# Altium PCB main board_PCB.PcbDoc
Units mm, origin at the board's own origin, x right, y up, seen from the top; angles counter-clockwise.
Board outline 135 x 63 mm, 2 copper layers (Top Layer, Bottom Layer); 89 components, 118 nets, 471 pads, 52 vias.
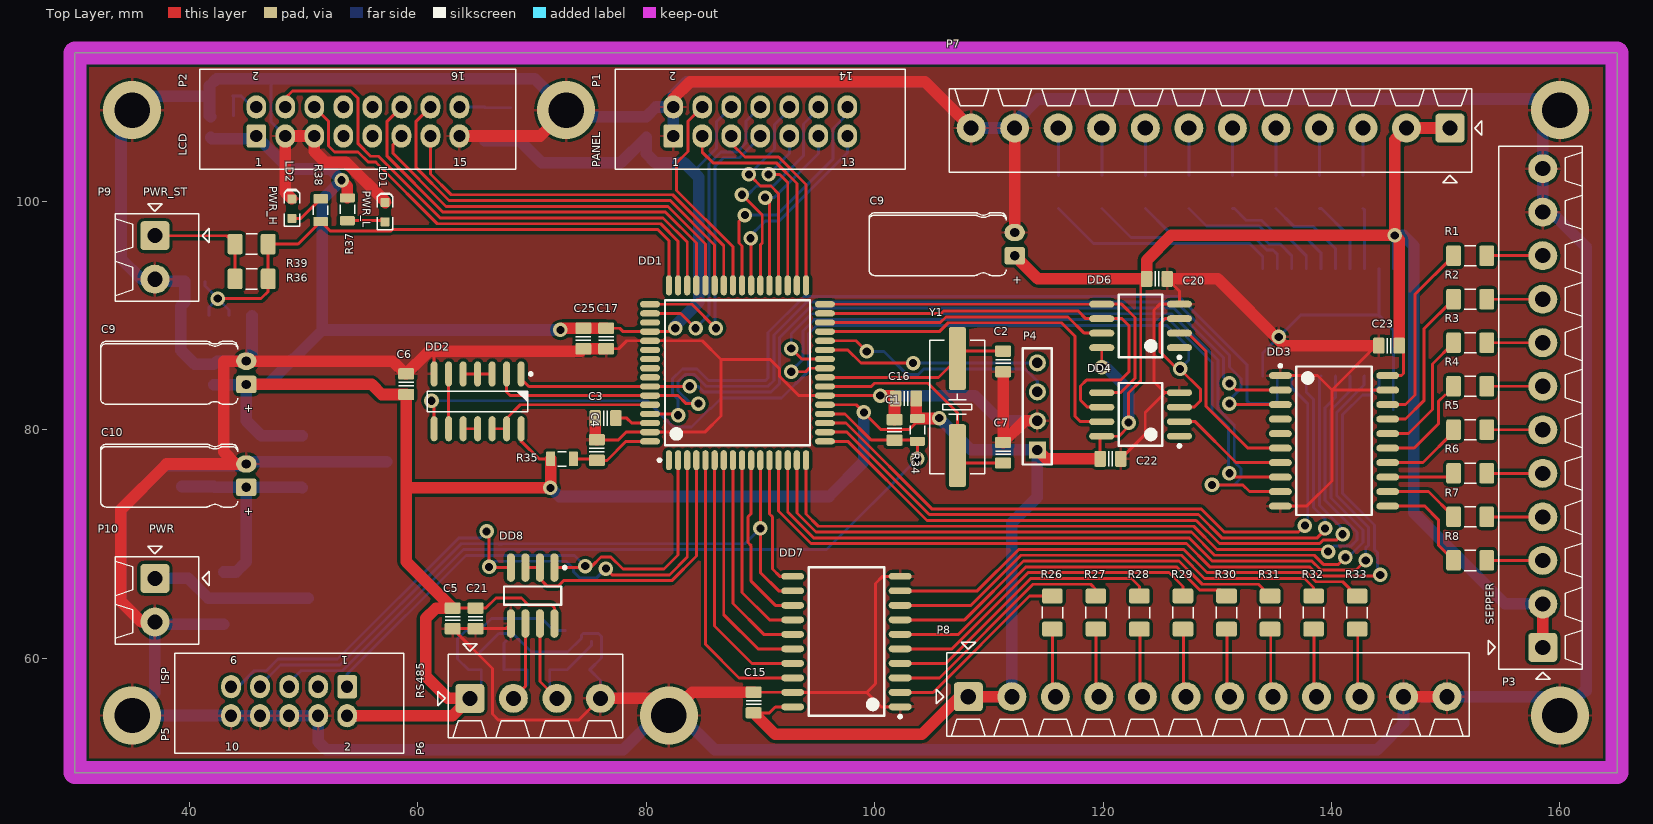
[diagram p0: Top Layer view]
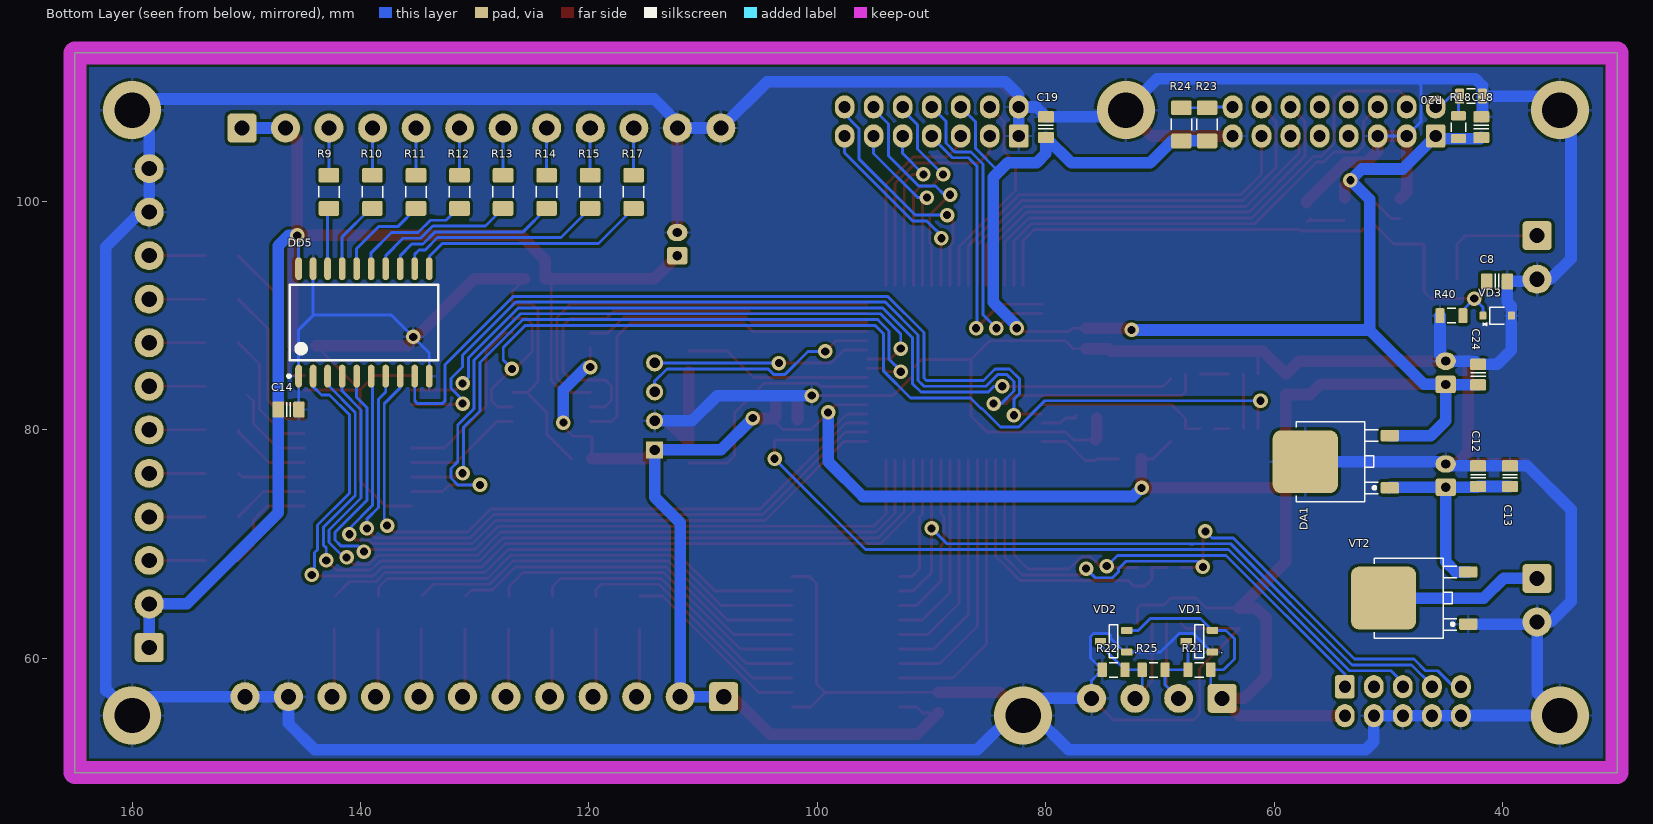
[diagram p1: Bottom Layer view, seen from below]

## Layer stack, top to bottom
Top Layer: signal copper 0.0356
Dielectric: dielectric 0.32, FR-4, Dk 4.8
Bottom Layer: signal copper 0.0356

## Board outline
30,50 30,113 165,113 165,50

## Design rules (kind name [scope] priority, off if disabled: settings)
Clearance [All] p1: gap=0.254
PolygonConnect [All] p1: connectstyle=Relief reliefconductorwidth=0.254 reliefentries=4 polygonreliefangle="90 Angle" airgapwidth=0.254
RoomDefinition "main board_CHM" [InComponentClass('main board_CHM')] p1: confinementstyle=ConfineIn formatcopy=TRUE lockcomponents=FALSE outline 165,113 30,113 30,50 165,50
RoutingVias [All] p1: holewidth=0.711 width=1.27 viastyle="Through Hole" minholewidth=0.711 minwidth=1.27 maxholewidth=0.711 maxwidth=1.27
SilkscreenOverComponentPads [All] p1: minsilkscreentomaskgap=0.254
SolderMaskExpansion [All] p1: expansion=0.102
Width "Schematic Width Constraint_2" [InNet('NetP10_1')] p1: maxlimit=1.016 minlimit=0.254 preferedwidth=1.016
Width "Schematic Width Constraint_1" [InNet('GND')] p2: maxlimit=1.016 minlimit=0.254 preferedwidth=1.016
Width "Schematic Width Constraint" [InNet('VCC+12V')] p3: maxlimit=1.016 minlimit=0.254 preferedwidth=1.016
Width "Schematic Width Constraint_3" [InNet('VCC')] p4: maxlimit=1.016 minlimit=0.254 preferedwidth=1.016
Width [All] p5: maxlimit=0.254 minlimit=0.254 preferedwidth=0.254
27 further rules are at their usual default settings.

## Components (designator, comment, footprint, x,y, rotation, side; value= is the part's Value field where it differs from the comment)
C1 "C0805" CAPC2012X135N 101.75,80 r270 top
C2 "C0805" CAPC2012X135N 111.25,86 r90 top
C3 "C0805" CAPC2012X135N 76.454,81.026 r0 top
C4 "C0805" CAPC2012X135N 75.692,78.232 r270 top
C5 "C0805" CAPC2012X135N 63.07,63.5 r90 top
C6 "C0805" CAPC2012X135N 59,84 r270 top
C7 "C0805" CAPC2012X135N 111.25,78 r270 top
C8 "C0805" CAPC2012X135N 40.5,93 r0 bottom
C9 "Cap Pol1" CAPAE200P550X1200_FLAT1 112.268,96.266 r90 top
C9 "Cap Pol1" CAPAE200P550X1200_FLAT1 45,85 r90 top
C10 "Cap Pol1" CAPAE200P550X1200_FLAT1 45,76 r90 top
C12 "C0805" CAPC2012X135N 42.164,75.946 r270 bottom
C13 "C0805" CAPC2012X135N 39.37,75.946 r270 bottom
C14 "C0805" CAPC2012X135N 146.304,81.788 r0 bottom
C15 "C0805" CAPC2012X135N 89.408,56.134 r270 top
C16 "C0805" CAPC2012X135N 102.75,82.75 r0 top
C17 "C0805" CAPC2012X135N 76.5,88 r90 top
C18 "C0805" CAPC2012X135N 41.888,106.5 r270 bottom
C19 "C0805" CAPC2012X135N 80,106.5 r270 bottom
C20 "C0805" CAPC2012X135N 124.714,93.218 r180 top
C21 "C0805" CAPC2012X135N 65.07,63.5 r90 top
C22 "C0805" CAPC2012X135N 120.65,77.47 r180 top
C23 "C0805" CAPC2012X135N 145.034,87.376 r0 top
C24 "C0805" CAPC2012X135N 42.164,84.836 r270 bottom
C25 "C0805" CAPC2012X135N 74.5,88 r90 top
DA1 "MC7805CD2TR4G" TO-252 53.594,77.216 r90 bottom
DD1 "ATmega128A-AU" 64A_N 88,85 r90 top
DD2 "MC74HC00AD" SOIC127P600X175-14AN 65.25,82.5 r270 top
DD3 "MC74HC541ADW" 751D-05_N 140.224,79.042 r0 top
DD4 "ATtiny25V-10SU" 8S2_N 123.288,81.353 r180 top
DD5 "MC74HC541ADW" 751D-05_N 139.7,89.408 r90 bottom
DD6 "ATtiny25V-10SU" 8S2_N 123.288,89.103 r180 top
DD7 "MC74HC541ADW" 751D-05_N 97.536,61.468 r180 top
DD8 "MAX485" S8S1_M 70.07,65.5 r270 top
LD1 "PWR_L" LED-0603-BLUE 57.15,99.06 r90 top
LD2 "PWR_H" LED-0603-GREEN 48.992,99.372 r90 top
P1 "PANEL" 14P_PCB_HEADER_BRD_MNT 90,107 r90 top
P2 "LCD" 16P_PCB_HEADER_BRD_MNT 54.768,107 r90 top
P3 "SEPPER" 12P_PCB_ScrewTerm_90S_3.81MM 158.496,60.96 r0 top
P4 "DEBUG" HDR1X4 114.25,78.25 r90 top
P5 "ISP" 10P_PCB_HEADER_BRD_MNT 48.75,56.25 r270 top
P6 "RS485" 4P_PCB_ScrewTerm_90S_3.81MM 64.57,56.5 r270 top
P7 "OUTPUTS" 12P_PCB_ScrewTerm_90S_3.81MM 150.368,106.426 r90 top
P8 "INPUTS" 12P_PCB_ScrewTerm_90S_3.81MM 108.204,56.642 r270 top
P9 "PWR_ST" 2P_PCB_ScrewTerm_90S_3.81MM 37,97 r180 top
P10 "PWR" 2P_PCB_ScrewTerm_90S_3.81MM 37,67 r180 top
R1 "Res2" RESC3216X70N 152.146,95.25 r0 top
R2 "Res2" RESC3216X70N 152.146,91.44 r0 top
R3 "Res2" RESC3216X70N 152.146,87.63 r0 top
R4 "Res2" RESC3216X70N 152.146,83.82 r0 top
R5 "Res2" RESC3216X70N 152.146,80.01 r0 top
R6 "Res2" RESC3216X70N 152.146,76.2 r0 top
R7 "Res2" RESC3216X70N 152.146,72.39 r0 top
R8 "Res2" RESC3216X70N 152.146,68.58 r0 top
R9 "Res2" RESC3216X70N 142.764,100.838 r90 bottom
R10 "Res2" RESC3216X70N 138.954,100.838 r90 bottom
R11 "Res2" RESC3216X70N 135.144,100.838 r90 bottom
R12 "Res2" RESC3216X70N 131.334,100.838 r90 bottom
R13 "Res2" RESC3216X70N 127.524,100.838 r90 bottom
R14 "Res2" RESC3216X70N 123.714,100.838 r90 bottom
R15 "Res2" RESC3216X70N 119.904,100.838 r90 bottom
R17 "Res2" RESC3216X70N 116.094,100.838 r90 bottom
R18 "Res2" RESC2012X70N 43.888,106.5 r90 bottom
R20 "Res2" RESC2012X70N 42.784,109.22 r0 bottom
R21 "Res2" RESC2012X70N 66.57,59 r180 bottom
R22 "Res2" RESC2012X70N 74.07,59 r180 bottom
R23 "Res2" RESC3216X70N 65.888,106.75 r90 bottom
R24 "Res2" RESC3216X70N 68.138,106.75 r90 bottom
R25 "Res2" RESC2012X70N 70.57,59 r0 bottom
R26 "Res2" RESC3216X70N 115.57,64.008 r270 top
R27 "Res2" RESC3216X70N 119.38,64.008 r270 top
R28 "Res2" RESC3216X70N 123.19,64.008 r270 top
R29 "Res2" RESC3216X70N 127,64.008 r270 top
R30 "Res2" RESC3216X70N 130.81,64.008 r270 top
R31 "Res2" RESC3216X70N 134.62,64.008 r270 top
R32 "Res2" RESC3216X70N 138.43,64.008 r270 top
R33 "Res2" RESC3216X70N 142.24,64.008 r270 top
R34 "Res2" RESC2012X70N 103.75,80 r270 top
R35 "Res2" RESC2012X70N 72.644,77.47 r180 top
R36 "Res2" RESC3216X70N 45.466,93.218 r0 top
R37 "Res2" RESC2012X70N 53.848,99.314 r90 top
R38 "Res2" RESC2012X70N 51.514,99.236 r270 top
R39 "Res2" RESC3216X70N 45.466,96.266 r0 top
R40 "Res2" RESC2012X70N 44.5,90 r180 bottom
VD1 "BAV99" SOT23-3 66.57,61.5 r0 bottom
VD2 "BAV99" SOT23-3 74.07,61.5 r0 bottom
VD3 "PDZ5.1V" SOD323 40.5,90 r180 bottom
VT2 "IRFU5505" TO-252 46.736,65.278 r90 bottom
Y1 "HC49/4H_SMX" CRYSTAL_HC49-US-SM 107.25,82 r90 top

## Footprints (in the part's own frame and the unit in brackets; to place one, negate y for a bottom-side part, rotate by r counter-clockwise, add the part's x,y. Pads: shape width x height; smd on the part's side, far side on the other; paste and mask are expansions set on the pad)
2P_PCB_ScrewTerm_90S_3.81MM [mil] "TERM BLOCK 2POS SIDE ENT STACKABLE 3.81MM"
  rrect25% 100x100 hole 52: 1(0,0)
  round 100 hole 52: 2(0,150)
  silkscreen extent -188,-110 136,226, body extent -152,-75 136,225, height 335
4P_PCB_ScrewTerm_90S_3.81MM [mil]
  rrect25% 100x100 hole 52: 1(0,0)
  round 100 hole 52: 2(0,150) 3(0,300) 4(0,450)
  silkscreen extent -188,-110 136,526, body extent -152,-75 136,525, height 335
8S2_N [mm] "SOP, 8-Leads, Body 5.3x5.3mm, Pitch 1.27mm, IPC Medium Density"
  oval 2.2x0.6 smd: 1(-3.4,1.905) 2(-3.4,0.635) 3(-3.4,-0.635) 4(-3.4,-1.905) 5(3.4,-1.905) 6(3.4,-0.635) 7(3.4,0.635) 8(3.4,1.905)
  silkscreen extent -3.52,-2.75 1.9,2.88, body extent -2.73,-2.75 2.73,2.75, height 2.16
10P_PCB_HEADER_BRD_MNT [mil] "HEADER BRD MNT 10POS 2.54MM"
  round 40 on Mech15: 0(0,0)
  rrect25% 80x68 hole 42: 1(-50,200)
  oval 80x68 hole 42: 2(50,200) 3(-50,100) 4(50,100) 5(-50,0) 6(50,0) 7(-50,-100) 8(50,-100) 9(-50,-200) 10(50,-200)
  silkscreen extent -165,-395 180,395, body extent -162,-394 178,394, height 390
12P_PCB_ScrewTerm_90S_3.81MM [mil]
  rrect25% 100x100 hole 52: 1(0,0)
  round 100 hole 52: 2(0,150) 3(0,300) 4(0,450) 5(0,600) 6(0,750) 7(0,900) 8(0,1050) 9(0,1200) 10(0,1350) 11(0,1500) 12(0,1650)
  silkscreen extent -188,-110 136,1726, body extent -152,-75 139,1725, height 335
14P_PCB_HEADER_BRD_MNT [mil] "HEADER BRD MNT 14POS 2.54MM"
  round 40 on Mech15: 0(0,0)
  rrect25% 80x68 hole 42: 1(-50,300)
  oval 80x68 hole 42: 2(50,300) 3(-50,200) 4(50,200) 5(-50,100) 6(50,100) 7(-50,0) 8(50,0) 9(-50,-100) 10(50,-100) 11(-50,-200) 12(50,-200) 13(-50,-300) 14(50,-300)
  silkscreen extent -165,-500 180,500, body extent -162,-494 178,494, height 390
16P_PCB_HEADER_BRD_MNT [mil] "HEADER BRD MNT 16POS 2.54MM"
  round 40 on Mech15: 0(0,0)
  rrect25% 80x68 hole 42: 1(-50,350)
  oval 80x68 hole 42: 2(50,350) 3(-50,250) 4(50,250) 5(-50,150) 6(50,150) 7(-50,50) 8(50,50) 9(-50,-50) 10(50,-50) 11(-50,-150) 12(50,-150) 13(-50,-250) 14(50,-250) 15(-50,-350) 16(50,-350)
  silkscreen extent -165,-545 180,545, body extent -162,-544 178,544, height 390
64A_N [mm] "Thin QFP, 64-Leads, Body 14x14mm, Pitch 0.8mm, IPC Medium Density"
  oval 1.75x0.55 smd: 1(-7.65,6) 2(-7.65,5.2) 3(-7.65,4.4) 4(-7.65,3.6) 5(-7.65,2.8) 6(-7.65,2) 7(-7.65,1.2) 8(-7.65,0.4) 9(-7.65,-0.4) 10(-7.65,-1.2) 11(-7.65,-2) 12(-7.65,-2.8) 13(-7.65,-3.6) 14(-7.65,-4.4) 15(-7.65,-5.2) 16(-7.65,-6) 33(7.65,-6) 34(7.65,-5.2) 35(7.65,-4.4) 36(7.65,-3.6) 37(7.65,-2.8) 38(7.65,-2) 39(7.65,-1.2) 40(7.65,-0.4) 41(7.65,0.4) 42(7.65,1.2) 43(7.65,2) 44(7.65,2.8) 45(7.65,3.6) 46(7.65,4.4) 47(7.65,5.2) 48(7.65,6)
  oval 0.55x1.75 smd: 17(-6,-7.65) 18(-5.2,-7.65) 19(-4.4,-7.65) 20(-3.6,-7.65) 21(-2.8,-7.65) 22(-2,-7.65) 23(-1.2,-7.65) 24(-0.4,-7.65) 25(0.4,-7.65) 26(1.2,-7.65) 27(2,-7.65) 28(2.8,-7.65) 29(3.6,-7.65) 30(4.4,-7.65) 31(5.2,-7.65) 32(6,-7.65) 49(6,7.65) 50(5.2,7.65) 51(4.4,7.65) 52(3.6,7.65) 53(2.8,7.65) 54(2,7.65) 55(1.2,7.65) 56(0.4,7.65) 57(-0.4,7.65) 58(-1.2,7.65) 59(-2,7.65) 60(-2.8,7.65) 61(-3.6,7.65) 62(-4.4,7.65) 63(-5.2,7.65) 64(-6,7.65)
  silkscreen extent -7.77,-6.35 6.35,6.95, body extent -7,-7 7,7, height 1.2
751D-05_N [mm] "SOIC, 20-Leads, Body 12.8x7.5mm, Pitch 1.27mm, IPC Medium Density"
  oval 2x0.6 smd: 1(-4.7,5.715) 2(-4.7,4.445) 3(-4.7,3.175) 4(-4.7,1.905) 5(-4.7,0.635) 6(-4.7,-0.635) 7(-4.7,-1.905) 8(-4.7,-3.175) 9(-4.7,-4.445) 10(-4.7,-5.715) 11(4.7,-5.715) 12(4.7,-4.445) 13(4.7,-3.175) 14(4.7,-1.905) 15(4.7,-0.635) 16(4.7,0.635) 17(4.7,1.905) 18(4.7,3.175) 19(4.7,4.445) 20(4.7,5.715)
  silkscreen extent -4.82,-6.5 3.3,6.69, body extent -3.8,-6.5 3.8,6.5, height 2.65
CAPAE200P550X1200_FLAT1 [mil]
  round 20 on Mech15: 0(0,0)
  rrect25% 60x70 hole 31.5: 1(-40,0)
  oval 60x70 hole 31.5: 2(40,0)
  silkscreen extent -108,30 108,502, body extent -107,-10 107,502, height 216
CAPC2012X135N [mm] "Chip Capacitor, Body 2.0x1.2mm, EIA 0805, IPC Medium Density"
  round 0.254 on Mech15: 0(0,0)
  rrect25% 1x1.4 smd: 1(-0.9,0) 2(0.9,0)
  Top Layer pour cut-out: -0.675,0.7 -0.475,0.9 0.475,0.9 0.675,0.7 0.675,-0.7 0.475,-0.9 -0.475,-0.9 -0.675,-0.7
  silkscreen extent -0.15,-0.65 0.15,0.65, body extent -1.1,-0.72 1.1,0.73, height 1.34
CRYSTAL_HC49-US-SM [mm] "SMD Crystal HC49/US-SM package"
  round 0.508 on Mech15: 0(0,0)
  rrect25% 5.5x1.5 smd: 1(-4.25,0) 2(4.25,0)
  silkscreen extent -5.84,-2.41 5.84,2.41, body extent -6.4,-2.41 6.4,2.42, height 4.29
HDR1X4 [mm] "Connector; Header; 4 Position"
  rect 1.5x1.5 hole 0.9: 1(0,0)
  round 1.5 hole 0.9: 2(2.54,0) 3(5.08,0) 4(7.62,0)
  silkscreen extent -1.27,-1.27 8.89,1.27
LED-0603-BLUE [mm]
  round 0.254 on Mech15: 0(0,0)
  rrect25% 0.8x0.8 smd: A(-0.85,0) K(0.85,0)
  Top Layer pour cut-out: -0.5,0.5 0.5,0.5 0.5,-0.5 -0.5,-0.5
  silkscreen extent -1.55,-0.67 1.68,0.67, body extent -0.8,-0.4 0.8,0.4, height 0.75
LED-0603-GREEN [mm]
  round 0.254 on Mech15: 0(0,0)
  rrect25% 0.8x0.8 smd: A(-0.85,0) K(0.85,0)
  Top Layer pour cut-out: -0.5,0.5 0.5,0.5 0.5,-0.5 -0.5,-0.5
  silkscreen extent -1.55,-0.67 1.68,0.67, body extent -0.8,-0.4 0.8,0.4, height 0.75
RESC2012X70N [mm] "Chip Resistor, Body 2.0x1.2mm, EIA 0805, IPC Medium Density"
  round 0.254 on Mech15: 0(0,0)
  rrect25% 0.8x1.3 smd: 1(-1,0) 2(1,0)
  Top Layer pour cut-out: -0.725,0.65 -0.525,0.85 0.525,0.85 0.725,0.65 0.725,-0.65 0.525,-0.85 -0.525,-0.85 -0.725,-0.65
  silkscreen extent -0.38,-0.64 0.38,0.64, body extent -1.1,-0.67 1.1,0.68, height 0.69
RESC3216X70N [mm] "Chip Resistor, Body 3.2x1.6mm, EIA 1206, IPC Medium Density"
  round 0.508 on Mech15: 0(0,0)
  rrect25% 1.3x1.8 smd: 1(-1.45,0) 2(1.45,0)
  silkscreen extent -0.51,-0.89 0.51,0.89, body extent -1.62,-0.82 1.63,0.83, height 0.69
S8S1_M [mm] "SOIC, 8-Leads, Body 4.9x3.9mm, Pitch 1.27mm, IPC Low Density"
  oval 2.5x0.7 smd: 1(-2.45,1.905) 2(-2.45,0.635) 3(-2.45,-0.635) 4(-2.45,-1.905) 5(2.45,-1.905) 6(2.45,-0.635) 7(2.45,0.635) 8(2.45,1.905)
  silkscreen extent -2.57,-2.5 0.8,2.93, body extent -2,-2.5 2,2.5, height 1.75
SOD323 [mm] "SOD-323; 2 Leads; Body 1.8 x 1.35 mm, (LxW)"
  round 0.508 on Mech15: 0(0,0)
  rrect25% 0.6x0.7 smd: A(1.25,0) K(-1.25,0)
  silkscreen extent -1.2,-0.9 0.64,0.75, body extent -1.3,-0.68 1.3,0.67, height 1.1
SOIC127P600X175-14AN [mm] "SOIC, 1.27mm pitch, 14 pin, Body 8.65x3.90mm"
  round 1 on Mech15: 0(0,0)
  oval 2.2x0.6 smd: 1(-2.4,3.81) 2(-2.4,2.54) 3(-2.4,1.27) 4(-2.4,0) 5(-2.4,-1.27) 6(-2.4,-2.54) 7(-2.4,-3.81) 8(2.4,-3.81) 9(2.4,-2.54) 10(2.4,-1.27) 11(2.4,0) 12(2.4,1.27) 13(2.4,2.54) 14(2.4,3.81)
  silkscreen extent -2.52,-4.4 0.9,4.79, body extent -3.01,-4.32 3.01,4.33, height 1.75
SOT23-3 [mm] "SOT23, 3 pin"
  round 0.5 on Mech15: 0(0,0)
  rrect25% 1x0.6 smd: 1(-1.15,0.95) 2(-1.15,-0.95) 3(1.15,0)
  silkscreen extent -0.38,-1.45 0.38,1.45, body extent -1.4,-1.45 1.4,1.45, height 1.29
TO-252 [mm] "D-PAK/TO-252-AA; 3 Leads (1 Cropped); Body 10.3 (inc. leads) x 6.7 mm (LxW max)"
  round 0.5 on Mech15: 0(0,0)
  rrect25% 1x1.6 smd: 1(-2.285,-3.7) 3(2.285,-3.7)
  rrect25% 5.5x5.7 smd: 4(0,3.7)
  silkscreen extent -3.5,-2.7 3.5,4.5, body extent -3.3,-3.95 3.3,5.76, height 2.31

## Part data
C1 C2 C3 C4 C5 C6 C7 C8 C12 C13 C14 C15 C16 C17 C18 C19 C20 C21 C22 C23 C24 C25: "Ceramic Chip Capacitor - Standard"
C9 C9 C10: "Polarized Capacitor (Radial)"
DA1: library part µA78M05CKTPR, "Positive-Voltage Regulator"
DD1: "8-bit AVR Microcontroller, 128KB Flash, 4KB EEPROM, 4KB SRAM, 64-pin TQFP, Industrial Grade (-40°C to 85°C)"
DD2: "Quad 2-Input NAND Gate"
DD3 DD5 DD7: "Octal 3-State Non-Inverting Buffer/Line Driver/Line Receiver"
DD4 DD6: "8-bit AVR Microcontroller, 1.8-5.5V, 2KB Flash, 128 Bytes EEPROM, 128 Bytes SRAM, 8-pin SOP, Industrial Grade (-40°C to 85°C), Pb-Free"
DD8: library part ST485
LD1 LD2: library part LED, "APT1608QBC/D"
P1: library part "Header 14", "Header, 14-Pin"
P2: library part "Header 16", "Header, 16-Pin"
P3 P7 P8: library part "Header 12", "Header, 12-Pin"
P4: library part "Header 4", "Header, 4-Pin"
P5: library part "Header 5X2", "Header, 5-Pin, Dual row"
P6: library part MHDR1X4, "Header, 4-Pin"
P9 P10: library part "Header 2H", "Header, 2-Pin, Right Angle"
R1 R2 R3 R4 R5 R6 R7 R8 R9 R10 R11 R12 R13 R14 R15 R17 R18 R20 R21 R22 R23 R24 R25 R26 R27 R28 R29 R30 R31 R32 R33 R34 R35 R36 R37 R38 R39 R40: "Resistor"
VD1 VD2: "Silicon Switching Diode Array for High-Speed Switching"
VD3: library part BAS170W, "Silicon AF Schottky Diode for High-Speed Switching"
VT2: "HEXFET Power MOSFET"
Y1: "Surface Mount Quartz Crystal"

## Via types
v1: diameter 1.27, hole 0.711, Top Layer to Bottom Layer, 46 vias
v2: diameter 5.08, hole 3.1, Top Layer to Bottom Layer, 6 vias

## Nets (pads, with @x,y where several pads share a name; then routed paths per layer and width w, separated by ;. In a path a pad name is that pad's centre, name@x,y a point inside that pad or via, vN(x,y) a via of type N, cw(c..) or ccw(c..) an arc to the next point about the centre after c; other vN are vias at no path point)
A: DD8.6 P6.2 R21.1 R25.1 VD1.3 | length 14.5
  Top Layer w0.254: P6.2 69.435,57.555 DD8.6
  Bottom Layer w0.254: VD1.3 67.57,61.35 R21.1 R25.1 69.57,57.69 P6.2
AREF: C3.2 DD1.62 | length 3.5
  Top Layer w0.254: C3.2 C3.2@77.608,81.026 ; C3.2@77.354,81.28 C3.2@77.608,81.026 ; DD1.62 78.74,80.6 78.314,81.026 C3.2@77.608,81.026
AVCC: C4.2 DD1.64 R35.1 | length 7.5
  Top Layer w0.254: R35.1 75.554,77.47 C4.2 76.57,77.332 78.238,79 DD1.64
B: DD8.7 P6.3 R22.2 R25.2 VD2.3 | length 14.8
  Top Layer w0.254: DD8.7 70.705,57.985 P6.3
  Bottom Layer w0.254: P6.3 71.57,57.12 R25.2 R22.2 75.22,61.15 VD2.3
B_LIG: P2.16 R23.2 R24.2 | length 4.5
  Bottom Layer w0.254: P2.16 R23.2@65.888,108.27 ; R23.2 R24.2
BPR: DD1.49 P1.7 | length 26
  Top Layer w0.254: DD1.49 84.006,91 v1(86.106,88.9)
  Bottom Layer w0.254: v1(86.106,88.9) 86.019,88.987 86.019,103.065 86.778,103.825 88.186,103.825 90,105.639 P1.7
BUT1: DD1.50 P1.8 | length 27.1
  Top Layer w0.254: DD1.50 83.028,90.2 v1(84.328,88.9)
  Bottom Layer w0.254: v1(84.328,88.9) 85.511,90.083 85.511,103.276 86.568,104.333 87.976,104.333 88.755,105.113 88.755,107.025 P1.8
BUT2: DD1.35 P1.9 | length 15.1
  Top Layer w0.254: v1(90.716,102.362) 91.694,102.362 92.4,101.656 DD1.35
  Bottom Layer w0.254: v1(90.716,102.362) 92.54,104.186 P1.9
BUT3: DD1.36 P1.10 | length 18.9
  Top Layer w0.254: v1@89.208,102.162 90.024,101.346 90.932,101.346 91.6,100.678 DD1.36
  Bottom Layer w0.254: v1@88.646,102 v1(89.008,102.362) 91.245,104.599 91.245,106.721 92.54,108.016 P1.10
BUT4: DD1.37 P1.11 | length 15.6
  Top Layer w0.254: v1(90.424,100.33) 90.8,99.954 DD1.37
  Bottom Layer w0.254: v1(90.424,100.33) 91.203,100.33 95.08,104.207 P1.11
BUT5: DD1.38 P1.12 | length 20.4
  Top Layer w0.254: v1(88.392,100.584) 90.17,98.806 90.17,96.353 90,96.183 DD1.38
  Bottom Layer w0.254: v1(88.392,100.584) 88.9,100.584 89.662,101.346 91.137,101.346 93.785,103.994 93.785,106.785 95.08,108.08 P1.12
BUT6: DD1.39 P1.13 | length 17.5
  Top Layer w0.254: v1@88.9,96.774 89.2,96.474 DD1.39
  Bottom Layer w0.254: v1@88.9,96.774 90.424,98.298 91.65,98.298 97.62,104.268 P1.13
  other v1: 89.154,96.774
BUT7: DD1.40 P1.14 | length 21.3
  Top Layer w0.254: DD1.40 88.4,96.091 88.138,96.353 88.138,98.298 v1(88.646,98.806)
  Bottom Layer w0.254: v1(88.646,98.806) 91.44,98.806 96.375,103.741 96.375,106.398 97.62,107.643 P1.14
CONTR: P2.2 R18.2 R20.2 | length 4.1
  Bottom Layer w0.254: R20.2 44.562,109.22 45.512,108.27 P2.2 ; R18.2 R20.2@43.888,109.116
D4: DD1.44 P2.11 | length 36.1
  Top Layer w0.254: P2.11 57.841,104.993 57.841,104.211 62.484,99.568 81.911,99.568 85.2,96.279 DD1.44
D5: DD1.45 P2.12 | length 38.8
  Top Layer w0.254: P2.12 57.333,107.025 57.333,103.957 62.23,99.06 81.701,99.06 84.4,96.361 DD1.45
D6: DD1.42 P2.13 | length 35.1
  Top Layer w0.254: P2.13 61.118,102.414 62.948,100.584 82.332,100.584 86.8,96.116 DD1.42
D7: DD1.43 P2.14 | length 38.3
  Top Layer w0.254: P2.14 59.873,107.025 59.873,102.941 62.738,100.076 82.122,100.076 86,96.198 DD1.43
DIR_ROT: DD1.25 DD3.8 | length 59.8
  Top Layer w0.254: v1(92.71,85.09) 93.98,85.09 94.29,85.4 DD1.25 ; v1(131.064,76.2) 131.397,75.867 DD3.8
  Bottom Layer w0.254: v1(92.71,85.09) 92.71,85.177 93.726,86.193 93.726,88.646 94.698,89.618 94.698,89.662 125.774,89.662 129.54,85.896 129.54,81.665 130.977,80.228 130.977,76.287 v1(131.064,76.2)
DIR_VERT: DD1.26 DD3.9 | length 64.5
  Top Layer w0.254: v1(92.71,87.122) 93.632,86.2 DD1.26 ; v1(129.54,75.184) 132.239,75.184 132.826,74.597 DD3.9
  Bottom Layer w0.254: v1(92.71,87.122) 92.71,88.392 94.488,90.17 125.984,90.17 130.048,86.106 130.048,81.875 131.485,80.438 131.485,77.216 132.08,76.621 132.08,75.779 131.485,75.184 v1(129.54,75.184)
E: DD1.47 P2.6 | length 41.9
  Top Layer w0.254: P2.6 52.203,107.025 52.203,104.847 52.717,104.333 54.785,104.333 55.67,103.449 56.361,103.449 56.361,103.405 61.722,98.044 81.28,98.044 82.804,96.52 82.804,92.654 DD1.47
GND: C1.1 C2.1 C3.1 C4.1 C5.1 C6.1 C7.1 C8.1 C9.2 C10.2 C12.1 C13.1 C14.1 C15.1 C16.1 C17.1 C18.1 C19.1 C20.1 C21.1 C22.1 C23.1 C24.1 C25.1 DA1.4 DD1.22 DD1.53 DD1.63 DD2.7 DD3.1 DD3.10 DD3.19 DD4.4 DD5.1 DD5.10 DD5.19 DD6.4 DD7.1 DD7.10 DD7.19 DD8.5 LD1.K LD2.K P1.1 P1.2 P2.3 P2.5 P2.15 P3.11 P3.12 P4.2 P5.4 P5.6 P5.8 P5.10 P6.4 P7.11 P7.12 P8.11 P8.12 P9.2 P10.2 R20.1 R22.1 R40.1 VD1.1 VD2.1 VD3.A VT2.1 | length 830.1
  Top Layer w0.254: DD2.7 61.44,86.69 61.618,86.868 ; DD8.5 67.715,62.6 C21.1 C5.1 66.548,59.122 66.548,55.118 67.056,54.61 74.11,54.61 P6.4 ; C4.1 77.585,79.132 78.253,79.8 DD1.63 85.134,79.8 86.556,81.222 86.556,86.164 ; C17.1 77.6,87.1 78.3,87.8 DD1.53 84.92,87.8 86.556,86.164 ; C15.1 92.825,57.034 DD7.19 99.314,57.023 ; v1(100.5,83) DD1.22 93.363,83 91.694,84.669 91.694,85.344 90.874,86.164 86.556,86.164 ; DD7.1 100.584,55.753 99.314,57.023 ; DD7.10 100.711,67.183 100.076,66.548 100.076,57.785 99.314,57.023 ; C22.1 123.698,79.618 123.698,81.534 125.422,83.258 ; C20.1 126.688,92.144 DD6.4@126.688,91.186 ; DD4.4 125.422,83.258 ; DD6.4 124.968,91.008 124.46,90.5 124.46,84.22 125.422,83.258 ; DD3.10 137.843,73.327 140.033,75.517 140.033,83.487 ; DD3.1 138.763,84.757 140.033,83.487 ; C23.1 143.922,87.376 140.033,83.487 ; DD3.19 140.033,83.487 ; P8.11@146.1,57 P8.11@146.304,57
  Top Layer w1.016: P10.2 35.81,63.19 34,65 34,73 38.016,77.016 44.084,77.016 ; C10.2 44.084,77.016 ; LD2.K 48.418,100.796 P2.3 P2.5 50.958,104.394 51.908,103.444 53.726,103.444 57.15,100.02 LD1.K ; P2.15 70.73,105.73 v2(73,108) ; C3.1 75.554,79.27 C4.1 ; P6.4 80.5,56.5 v2(82,55) 84.034,57.034 C15.1 ; C17.1 C25.1 74.268,86.868 61.618,86.868 60.968,86.868 C6.1 58.938,84.9 57.822,86.016 45,86.016 43.016,86.016 43.016,78.084 44.084,77.016 ; P1.2 82.38,109.016 83.854,110.49 104.41,110.49 P7.12@108.474,106.426 ; v1(100.5,83) 101.6,83 101.75,82.85 C1.1 ; C2.1 C7.1 113.14,80.79 P4.2 ; C9.2@112.268,97.282 P7.11 ; C20.1 130.048,93.218 135.89,87.376 C23.1@143.922,87.376 ; P8.11 P8.12
  Bottom Layer w0.254: 47.509,110.5 47.173,110.165 47.173,106.975 P2.3 P2.5 ; VD1.1 65.475,60.55 67.106,62.181 68.334,62.181 69.965,60.55 VD2.1 73.12,60.55 74.339,61.769 74.339,62.035 74.485,62.181 75.834,62.181 76.101,61.914 76.101,60.031 R22.1 76,58.07 P6.4 ; P1.1@82.5,105.5 P1.2@82.5,108.04 ; DD5.10 133.985,86.741 v1(135.382,88.138) 137.287,90.043 144.145,90.043 ; DD5.19 144.145,90.043 ; C14.1 145.404,84.697 DD5.1 145.415,88.773 144.145,90.043
  Bottom Layer w1.016: C18.1 41.784,107.504 R20.1 ; VT2.1 37.197,62.993 P10.2 ; R40.1 45.5,86.516 45,86.016 42.444,86.016 C24.1 40.502,85.736 39.25,86.988 VD3.A 39.25,90.812 39.6,91.162 C8.1 37.19,93 P9.2 35.842,93.19 34.036,94.996 34.036,107.036 36.22,109.22 R20.1 ; DA1.4 45.2,77.216 C10.2 44.83,76.846 C12.1 C13.1 37.846,76.846 34,73 34,65 35.81,63.19 P10.2 ; P6.4 80.5,56.5 v2(82,55) ; P1.1 P1.2 ; v1(100.5,83) 108.77,83 110.98,80.79 P4.2 ; P10.2 37,57 v2(35,55) 43.65,55 P5.10 P5.8 P5.6 P5.4 51.29,52.71 52,52 78,52 81,55 v2(82,55) ; R20.1 41.784,110.11 42.418,110.744 70.256,110.744 v2(73,108) 73.6,107.4 C19.1 80.87,108.27 P1.2 ; v2(82,55) 83,55 86,52 144,52 146.304,54.304 P8.11 P8.12 158.358,56.642 v2(160,55) 162.15,57.15 162.306,57.15 162.306,96.012 159.258,99.06 P3.11 P3.12 158.496,106.496 v2(160,108) 159.034,108.966 114.3,108.966 112.268,106.934 P7.11 P7.12 104.394,110.49 83.566,110.49 82.38,109.304 P1.2
  other v2: 35,108
IN_1: DD1.5 DD7.18 | length 25
  Top Layer w0.254: DD1.5 85.2,61.231 88.138,58.293 DD7.18
IN_2: DD1.6 DD7.17 | length 22.7
  Top Layer w0.254: DD1.6 86,62.844 89.281,59.563 DD7.17
IN_3: DD1.7 DD7.16 | length 20.8
  Top Layer w0.254: DD1.7 86.8,63.822 89.789,60.833 DD7.16
IN_4: DD1.8 DD7.15 | length 18.9
  Top Layer w0.254: DD1.8 87.6,64.8 90.297,62.103 DD7.15
IN_5: DD1.9 DD7.14 | length 17
  Top Layer w0.254: DD1.9 88.4,65.778 90.805,63.373 DD7.14
IN_6: DD1.10 DD7.13 | length 15.3
  Top Layer w0.254: DD1.10 89.2,72.682 88.908,72.39 88.908,70.142 89.2,69.85 89.2,66.756 91.313,64.643 DD7.13
IN_7: DD1.11 DD7.12 P5.7 | length 62.9
  Top Layer w0.254: DD1.11 v1(90,71.374) 90,67.524 91.611,65.913 DD7.12
  Bottom Layer w0.254: P5.7 46.21,57.64 47.995,59.425 53.207,59.425 63.814,70.032 67.092,70.032 67.1,70.024 67.397,70.024 67.405,70.032 88.658,70.032 v1(90,71.374)
IN_8: DD1.12 DD7.11 | length 11.7
  Top Layer w0.254: DD1.12 90.8,72.644 91.054,72.39 91.054,67.823 91.694,67.183 DD7.11
LD1: DD1.34 P1.3 | length 19.8
  Top Layer w0.254: P1.3 84.92,104.31 85.852,103.378 91.396,103.378 93.2,101.574 DD1.34
LD2: DD1.41 P1.4 | length 18.6
  Top Layer w0.254: P1.4 83.675,107.025 83.675,104.38 82.673,103.378 82.673,100.961 87.6,96.035 DD1.41
LD3: DD1.33 P1.5 | length 17.5
  Top Layer w0.254: P1.5 87.46,105.072 88.646,103.886 91.607,103.886 94,101.493 DD1.33
MOW_EN: DD1.59 DD2.2 DD3.3 | length 87.7
  Top Layer w0.254: DD2.2 67.79,83.312 68.102,83 DD1.59 82.804,83 83.508,82.296 v1(84.582,82.296) ; v1(131.064,82.296) 131.143,82.217 DD3.3
  Bottom Layer w0.254: v1(84.582,82.296) 83.907,82.296 82.804,83.399 82.804,84.241 83.399,84.836 84.241,84.836 85.257,83.82 90.678,83.82 91.186,84.328 91.186,88.305 94.067,91.186 126.405,91.186 131.064,86.527 131.064,85.511 132.08,84.495 132.08,83.653 131.064,82.637 v1(131.064,82.296)
MOW_ON: DD1.58 DD2.1 DD3.2 | length 76.4
  Top Layer w0.254: DD2.1@69.06,84.472 69.732,83.8 DD1.58 83.8,83.8 v1(83.82,83.82) ; v1(131.064,84.074) 131.651,83.487 DD3.2
  Bottom Layer w0.254: v1(83.82,83.82) 84.538,83.82 85.046,83.312 90.932,83.312 91.694,84.074 91.694,88.094 94.278,90.678 126.194,90.678 130.556,86.316 130.556,84.582 v1(131.064,84.074)
NetDD2_3: DD2.3 DD2.4 DD2.5 | length 2.5
  Top Layer w0.254: DD2.5 DD2.4 DD2.3
NetDD2_6: DD2.6 DD2.9 | length 4.8
  Top Layer w0.254: DD2.9 DD2.6
NetDD2_10: DD2.10 DD2.11 | length 1.3
  Top Layer w0.254: DD2.10 DD2.11
NetDD3_11: DD3.11 R8.1 | length 9
  Top Layer w0.254: DD3.11 148.161,73.327 149.352,72.136 149.352,69.924 R8.1
NetDD3_12: DD3.12 R7.1 | length 6.7
  Top Layer w0.254: DD3.12 148.489,74.597 R7.1
NetDD3_13: DD3.13 R6.1 | length 5.9
  Top Layer w0.254: DD3.13 150.363,75.867 R6.1
NetDD3_14: DD3.14 R5.1 | length 7.1
  Top Layer w0.254: DD3.14 148.003,77.137 150.696,79.83 R5.1
NetDD3_15: DD3.15 R4.1 | length 8.1
  Top Layer w0.254: DD3.15 147.241,78.407 149.352,80.518 149.352,82.476 149.934,83.058
NetDD3_16: DD3.16 R3.1 | length 11.4
  Top Layer w0.254: DD3.16 146.733,79.677 148.844,81.788 148.844,85.778 R3.1
NetDD3_17: DD3.17 R2.1 | length 13.8
  Top Layer w0.254: DD3.17 146.479,80.947 148.082,82.55 148.082,88.826 R2.1
NetDD3_18: DD3.18 R1.1 | length 16.3
  Top Layer w0.254: DD3.18 146.479,82.217 147.32,83.058 147.32,91.874 R1.1
NetDD5_11: DD5.11 R17.1 | length 20.7
  Bottom Layer w0.254: R17.1 119.157,96.325 132.842,96.325 133.985,95.182 DD5.11
NetDD5_12: DD5.12 R15.1 | length 18.3
  Bottom Layer w0.254: R15.1 122.459,96.833 133.251,96.833 134.326,95.758 134.874,95.758 135.255,95.377 DD5.12
NetDD5_13: DD5.13 R14.1 | length 15.7
  Bottom Layer w0.254: R14.1 125.761,97.341 133.462,97.341 134.537,96.266 135.509,96.266 136.525,95.25 DD5.13
NetDD5_14: DD5.14 R13.1 | length 13.1
  Bottom Layer w0.254: R13.1 129.063,97.849 133.672,97.849 134.747,96.774 136.271,96.774 137.795,95.25 DD5.14
NetDD5_15: DD5.15 R12.1 | length 10.7
  Bottom Layer w0.254: R12.1 131.498,99.388 132.529,98.357 133.882,98.357 134.957,97.282 137.287,97.282 139.065,95.504 DD5.15
NetDD5_16: DD5.16 R11.1 | length 8.4
  Bottom Layer w0.254: R11.1 136.742,97.79 138.43,97.79 140.335,95.885 DD5.16
NetDD5_17: DD5.17 R10.1 | length 6.5
  Bottom Layer w0.254: R10.1 139.118,99.388 141.605,96.901 DD5.17
NetDD5_18: DD5.18 R9.1 | length 5.3
  Bottom Layer w0.254: R9.1 142.875,99.277 DD5.18
NetDD7_2: DD7.2 R26.1 | length 16.8
  Top Layer w0.254: DD7.2 105.13,57.023 113.565,65.458 R26.1
NetDD7_3: DD7.3 R27.1 | length 21.3
  Top Layer w0.254: DD7.3 105.682,58.293 113.878,66.489 118.931,66.489 119.38,66.04 R27.1
NetDD7_4: DD7.4 R28.1 | length 25.2
  Top Layer w0.254: DD7.4 106.233,59.563 113.667,66.997 122.487,66.997 123.19,66.294 R28.1
NetDD7_5: DD7.5 R29.1 | length 28.9
  Top Layer w0.254: DD7.5 106.785,60.833 113.457,67.505 125.789,67.505 127,66.294 R29.1
NetDD7_6: DD7.6 R30.1 | length 32.1
  Top Layer w0.254: DD7.6 107.337,62.103 113.247,68.013 126.439,68.013 128.471,65.981 130.287,65.981 R30.1
NetDD7_7: DD7.7 R31.1 | length 35.8
  Top Layer w0.254: DD7.7 107.888,63.373 113.036,68.521 126.649,68.521 128.681,66.489 133.604,66.489 134.62,65.473 R31.1
NetDD7_8: DD7.8 R32.1 | length 39.9
  Top Layer w0.254: DD7.8 108.44,64.643 112.826,69.029 126.859,69.029 128.891,66.997 137.647,66.997 138.43,66.214 R32.1
NetDD7_9: DD7.9 R33.1 | length 43.2
  Top Layer w0.254: DD7.9 108.991,65.913 112.615,69.537 127.07,69.537 129.102,67.505 137.858,67.505 138.655,66.708 140.99,66.708 R33.1
NetLD1_A: LD1.A R37.1 | length 3.6
  Top Layer w0.254: R37.1 57.046,98.314 LD1.A ; LD1.A@56.834,98.481 LD1.A@56.984,98.331
NetLD2_A: LD2.A R38.1 | length 3.2
  Top Layer w0.254: LD2.A 49.8,98.522 R38.1
NetP3_3: P3.3 R8.2 | length 4.9
  Top Layer w0.254: R8.2 P3.3
NetP3_4: P3.4 R7.2 | length 4.9
  Top Layer w0.254: R7.2 P3.4
NetP3_5: P3.5 R6.2 | length 4.9
  Top Layer w0.254: R6.2 P3.5
NetP3_6: P3.6 R5.2 | length 4.9
  Top Layer w0.254: R5.2 P3.6
NetP3_7: P3.7 R4.2 | length 4.9
  Top Layer w0.254: R4.2 P3.7
NetP3_8: P3.8 R3.2 | length 4.9
  Top Layer w0.254: R3.2 P3.8
NetP3_9: P3.9 R2.2 | length 4.9
  Top Layer w0.254: R2.2 P3.9
NetP3_10: P3.10 R1.2 | length 4.9
  Top Layer w0.254: R1.2 P3.10
NetP7_3: P7.3 R9.2 | length 4.1
  Bottom Layer w0.254: P7.3 142.764,106.41 R9.2
NetP7_4: P7.4 R10.2 | length 4.1
  Bottom Layer w0.254: P7.4 138.954,106.41 R10.2
NetP7_5: P7.5 R11.2 | length 4.1
  Bottom Layer w0.254: P7.5 135.144,106.41 R11.2
NetP7_6: P7.6 R12.2 | length 4.1
  Bottom Layer w0.254: P7.6 131.334,106.41 R12.2
NetP7_7: P7.7 R13.2 | length 4.1
  Bottom Layer w0.254: P7.7 127.524,106.41 R13.2
NetP7_8: P7.8 R14.2 | length 4.1
  Bottom Layer w0.254: P7.8 123.714,106.41 R14.2
NetP7_9: P7.9 R15.2 | length 4.1
  Bottom Layer w0.254: P7.9 119.904,106.41 R15.2
NetP7_10: P7.10 R17.2 | length 4.1
  Bottom Layer w0.254: P7.10 116.094,106.41 R17.2
NetP8_3: P8.3 R26.2 | length 6.3
  Top Layer w0.254: R26.2 115.57,56.642 P8.3@115.824,56.388
NetP8_4: P8.4 R27.2 | length 6.3
  Top Layer w0.254: R27.2 119.38,56.642 P8.4@119.634,56.388 ; R27.2@119.43,62.558 R27.2@119.43,62.562 ; R27.2@119.442,62.558 R27.2@119.442,62.574
NetP8_5: P8.5 R28.2 | length 5.5
  Top Layer w0.254: P8.5@123.24,57 R28.2@123.24,62.508
NetP8_6: P8.6 R29.2 | length 5.6
  Top Layer w0.254: P8.6@127.062,57.012 R29.2@127.062,62.574
NetP8_7: P8.7 R30.2 | length 5.6
  Top Layer w0.254: P8.7@130.86,57 R30.2@130.86,62.562
NetP8_8: P8.8 R31.2 | length 5.6
  Top Layer w0.254: P8.8@134.682,57.012 R31.2@134.682,62.574
NetP8_9: P8.9 R32.2 | length 5.6
  Top Layer w0.254: P8.9@138.48,57 R32.2@138.48,62.562
NetP8_10: P8.10 R33.2 | length 5.6
  Top Layer w0.254: P8.10@142.29,57 142.302,57.012 R33.2@142.302,62.574
NetP9_1: P9.1 R36.1 R39.1 | length 10.4
  Top Layer w0.254: P9.1 43.282,97 R39.1 R36.1
NetP10_1: P10.1 VT2.4 | length 14.1
  Bottom Layer w1.016: P10.1 39.934,67 41.656,65.278 VT2.4
OUT_1: DD1.13 DD5.2 | length 80
  Top Layer w0.254: DD1.13 91.6,72.889 94.444,70.045 127.313,70.045 129.345,68.013 138.068,68.013 138.865,67.216 144.178,67.216 v1(144.272,67.31)
  Bottom Layer w0.254: DD5.2 144.145,83.778 143.425,83.058 142.704,83.058 140.97,81.324 140.97,74.458 143.764,71.664 143.764,69.509 144.018,69.255 144.018,67.564 v1(144.272,67.31)
OUT_2: DD1.14 DD5.3 | length 76
  Top Layer w0.254: DD1.14 92.4,72.807 94.654,70.553 127.523,70.553 129.555,68.521 138.279,68.521 139.076,67.724 142.146,67.724 v1(143.002,68.58)
  Bottom Layer w0.254: DD5.3 142.853,84.686 142.853,83.925 140.462,81.534 140.462,74.248 143.256,71.454 143.256,69.937 143.002,69.683 v1(143.002,68.58)
OUT_3: DD1.15 DD5.4 | length 73.2
  Top Layer w0.254: DD1.15 93.2,72.726 94.865,71.061 127.734,71.061 129.766,69.029 138.489,69.029 139.286,68.232 140.622,68.232 v1(141.224,68.834)
  Bottom Layer w0.254: v1(141.224,68.834) 141.434,68.834 142.748,70.148 142.748,71.243 139.954,74.037 139.954,81.744 141.605,83.395 DD5.4
OUT_4: DD1.16 DD5.5 | length 70.6
  Top Layer w0.254: DD1.16 94,72.644 95.075,71.569 127.944,71.569 129.976,69.537 139.505,69.537 v1(139.7,69.342)
  Bottom Layer w0.254: v1(139.7,69.342) 140.208,69.85 141.732,69.85 142.24,70.358 142.24,71.033 139.446,73.827 139.446,81.955 140.335,82.844 DD5.5
OUT_5: DD1.17 DD5.6 | length 64.1
  Top Layer w0.254: DD1.17 97.661,79 104.584,72.077 128.155,72.077 130.187,70.045 138.966,70.045 139.279,70.358 140.462,70.358 v1(140.97,70.866)
  Bottom Layer w0.254: DD5.6 138.938,84.581 138.938,73.406 140.97,71.374 v1(140.97,70.866)
OUT_6: DD1.18 DD5.7 | length 63
  Top Layer w0.254: DD1.18 97.579,79.8 104.794,72.585 128.365,72.585 130.397,70.553 138.756,70.553 139.069,70.866 139.446,70.866 139.954,71.374 v1(139.446,71.374)
  Bottom Layer w0.254: DD5.7 137.795,83.312 138.43,82.677 138.43,73.196 139.446,72.18 v1(139.446,71.374)
OUT_7: DD1.19 DD5.8 | length 60
  Top Layer w0.254: DD1.19 97.498,80.6 105.005,73.093 128.576,73.093 130.608,71.061 137.101,71.061 v1(137.668,71.628)
  Bottom Layer w0.254: DD5.8 136.525,83.693 137.922,82.296 137.922,71.882 v1(137.668,71.628)
OUT_8: DD1.61 DD5.9 | length 73
  Top Layer w0.254: DD1.61 82.684,81.4 v1(82.804,81.28)
  Bottom Layer w0.254: v1(82.804,81.28) 82.804,82.681 82.296,83.189 82.296,84.451 83.189,85.344 84.451,85.344 85.467,84.328 90.468,84.328 90.678,84.538 90.678,88.515 93.857,91.694 126.615,91.694 132.588,85.721 132.588,82.55 132.842,82.296 135.001,82.296 135.255,82.55 DD5.9
PDI: DD1.2 DD8.1 P5.1 | length 47.1
  Top Layer w0.254: DD8.1 74.554,67.95 v1(74.676,68.072) 75.251,68.072 76.061,68.882 76.903,68.882 77.967,67.818 81.578,67.818 82.8,69.04 DD1.2
  Bottom Layer w0.254: P5.1 53.83,58.612 64.234,69.016 66.671,69.016 66.679,69.008 67.818,69.008 67.826,69.016 73.732,69.016 v1(74.676,68.072)
PDO: DD1.3 DD8.4 P5.9 | length 61.1
  Top Layer w0.254: v1(66.04,71.12) 66.25,70.91 v1(66.25,68) 66.3,67.95 DD8.4 ; v1(76.482,67.866) 77.038,67.31 82.042,67.31 83.6,68.868 DD1.3
  Bottom Layer w0.254: P5.9 44.297,57.52 45.694,58.917 46.769,58.917 47.785,59.933 52.996,59.933 63.603,70.54 65.46,70.54 v1(66.04,71.12) ; v1(66.25,68) 66.75,68.5 72.978,68.5 73.66,67.818 73.66,67.564 74.168,67.056 75.672,67.056 v1(76.482,67.866)
PWR_ST: C8.2 DD1.48 R36.2 R38.2 R39.2 R40.2 VD3.K | length 55.1
  Top Layer w0.254: v1(42.5,91.5) 46.288,91.5 46.916,92.128 R36.2 R39.2 49.544,96.266 R38.2 52.321,97.429 57.649,97.429 57.756,97.536 81.026,97.536 82,96.562 DD1.48
  Bottom Layer w0.254: C8.2 41.4,92.6 v1(42.5,91.5) ; VD3.K 41.75,90.75 v1(42.5,91.5) ; R40.2 43.5,90.5 v1(42.5,91.5)
RES: C1.2 DD1.20 P5.5 R34.2 | length 74.1
  Top Layer w0.254: DD1.20 97.416,81.4 99.716,79.1 C1.2 103.65,79.1 R34.2 v1(103.75,77.47)
  Bottom Layer w0.254: P5.5 48.75,57.883 49.784,58.917 53.417,58.917 64.024,69.524 66.881,69.524 66.889,69.516 67.607,69.516 67.615,69.524 95.804,69.524 v1(103.75,77.47)
ROTATION: DD3.7 DD4.2 | length 10.3
  Top Layer w0.254: DD4.2 128.07,80.718 131.651,77.137 DD3.7
RS: DD1.46 P2.4 | length 47.8
  Top Layer w0.254: P2.4 48.418,109.03 49.055,109.667 54.126,109.667 54.793,109 54.793,105.043 55.88,103.957 56.571,103.957 61.976,98.552 81.49,98.552 83.6,96.442 DD1.46
RXD1: DD1.27 P4.4 | length 19.1
  Top Layer w0.254: DD1.27 97.658,87 98.806,85.852 v1(103.378,85.852)
  Bottom Layer w0.254: v1(103.378,85.852) 114.232,85.852 P4.4
STEPP_CLK: DD1.31 DD4.6 DD6.6 | length 39.4
  Top Layer w0.254: DD1.31 105.834,90.2 106.031,90.397 117.829,90.397 118.488,89.738 DD6.6 121.653,89.738 122.288,89.103 122.288,85.103 121.538,84.353 118.538,84.353 118.038,83.853 118.038,82.603 118.653,81.988 DD4.6
STEPP_CS1: DD1.29 DD4.7 | length 32.2
  Top Layer w0.254: DD1.29 105.671,88.6 106.452,89.381 116.359,89.381 117.53,88.21 117.53,81.226 118.038,80.718 DD4.7
STEPP_CS2: DD1.30 DD6.7 | length 25
  Top Layer w0.254: DD1.30 105.753,89.4 106.242,89.889 116.943,89.889 118.364,88.468 DD6.7
STEPP_DATA: DD1.32 DD4.5 DD6.5 | length 36.4
  Top Layer w0.254: DD1.32 119.88,91 DD6.5 121.633,91.008 122.796,89.845 122.796,84.516 121.538,83.258 DD4.5
STEPPER_EN: DD2.8 DD4.3 DD6.3 | length 90.7
  Top Layer w0.254: v1(61.214,82.55) 61.44,82.324 DD2.8 ; DD4.3 127.962,81.988 128.524,82.55 128.524,83.566 v1(126.746,85.344) 126.492,85.344 124.968,86.868 124.968,89.283 125.423,89.738 DD6.3
  Bottom Layer w0.254: v1(61.214,82.55) 80.097,82.55 82.383,80.264 83.987,80.264 85.598,81.875 85.685,81.875 86.614,82.804 91.861,82.804 94.234,85.177 94.234,88.436 94.952,89.154 125.563,89.154 127.508,87.209 127.508,86.106 v1(126.746,85.344)
TXD1: DD1.28 P4.3 | length 21.4
  Top Layer w0.254: DD1.28 98.382,87.8 v1(99.314,86.868)
  Bottom Layer w0.254: v1(99.314,86.868) 100.838,86.868 102.87,84.836 103.799,84.836 104.307,85.344 113.177,85.344 114.25,84.271 P4.3
TXDE: DD1.4 DD8.2 DD8.3 | length 25.7
  Top Layer w0.254: DD8.3 DD8.2 70.705,66.963 71.349,66.319 72.278,66.319 72.761,66.802 82.252,66.802 84.4,68.95 DD1.4
VCC: C5.2 C6.2 C9.1 C14.2 C15.2 C16.2 C17.2 C18.2 C19.2 C20.2 C21.2 C22.2 C23.2 C24.2 C25.2 DA1.3 DD1.21 DD1.52 DD2.14 DD3.20 DD4.8 DD5.20 DD6.8 DD7.20 DD8.8 P1.6 P2.1 P3.1 P3.2 P4.1 P5.2 P6.1 P7.1 P7.2 P8.1 P8.2 R18.1 R21.2 R23.1 R24.1 R34.1 R35.2 R37.2 VD1.2 VD2.2 | length 491.4
  Top Layer w0.254: P2.1@45.878,105.252 P2.1 ; C5.2 C21.2 65.97,64.4 66.848,65.278 69.088,65.278 69.685,64.681 71.717,64.681 71.975,64.423 DD8.8 ; 69.06,78.966 69.116,78.966 70.612,77.47 R35.2 ; C17.2 77.7,88.9 78,88.6 DD1.52 82.25,88.6 v1(82.55,88.9) ; C15.2 90.794,55.234 91.313,55.753 DD7.20 ; DD1.21 98.394,82.2 v1(99.06,81.534) 100.575,80.019 103.019,80.019 103.75,80.75 R34.1 R34.1@103.65,81.1 ; C22.2 119.75,79.31 DD4.8 121.397,79.448 122.236,80.287 v1(122.236,80.641) 122.236,83.238 123.304,84.306 123.304,92.708 C20.2 ; v1(119.888,85.503) DD6.8 ; DD3.20 146.129,84.757 146.304,84.932 146.304,86.868 C23.2@145.865,87.307
  Top Layer w1.016: C9.1@45,83.984 55.97,83.984 56.854,83.1 C6.2 59,74.676 ; v1(53.34,101.854) 53.848,101.346 R37.2 ; P5.2 63.05,54.98 P6.1 62.626,56.5 60.706,58.42 60.706,63.5 61.606,64.4 C5.2 59,68.47 59,74.676 ; v1(71.628,74.93) 59.254,74.93 59,74.676 ; v1@71.644,74.946 R35.2 ; v1(72.5,88.75) 72.65,88.9 C25.2 C17.2 ; C15.2 91.302,53.34 104.14,53.34 107.442,56.642 P8.1 P8.2 ; R34.1@103.65,81.1 C16.2 ; R34.1 v1@105.638,81 ; C9.1@112.268,95.25 114.3,93.218 C20.2 123.814,94.858 125.984,97.028 v1(145.542,97.028) ; P4.1 115.03,77.47 C22.2 ; C23.2 145.934,96.636 v1(145.542,97.028) ; P7.1 P7.2 145.542,105.41 v1(145.542,97.028) ; P3.1 P3.2
  Bottom Layer w0.254: P6.1 65.57,57.5 R21.2 64.444,59 63.5,59.944 63.5,61.722 64.228,62.45 VD1.2 66.47,63.5 70.866,63.5 71.916,62.45 VD2.2 ; 84.23,102.714 86.165,104.648 86.165,106.975 P1.6 ; DD5.20 v1@145.415,97.028 ; P7.1@150.368,106.172 P7.1@150.384,106.172
  Bottom Layer w1.016: C18.2 41.988,105.5 R18.1 45.648,105.5 P2.1 48.768,102.84 52.354,102.84 v1(53.34,101.854) 51.666,100.18 51.666,88.75 ; C24.2 44.952,83.936 C9.1@45,83.984 ; DA1.3 DA1.3 46.312,79.502 45,80.814 C9.1@45,83.984 ; R23.1 R24.1 68.944,105.3 70.866,103.378 77.778,103.378 C19.2 80,104.192 80.814,103.378 83.352,103.378 84.622,102.108 84.622,91.186 82.55,89.114 v1(82.55,88.9) ; v1(71.628,74.93) 72.39,74.168 96.012,74.168 99.06,77.216 v1(99.06,81.534) ; v1(72.5,88.75) 51.666,88.75 ; v1(105.664,81.026) 108.44,78.25 P4.1 114.25,74.118 112.014,71.882 P8.2 P8.1 ; v1(119.888,85.503) 120.237,85.503 122.236,83.504 v1(122.236,80.641) ; v1(145.542,97.028) 146.304,97.028 147.204,96.128 C14.2 147.204,72.76 155.194,64.77 P3.2 P3.1 ; P7.2 P7.1 ; C9.1@45,83.984 46.9,83.984 51.666,88.75
VCC+12V: C10.1 C12.2 C13.2 DA1.1 VT2.3 | length 19.4
  Bottom Layer w1.016: C13.2 C12.2 42.226,74.984 C10.1 ; VT2.3 44.097,67.563 45,68.466 C10.1 ; DA1.1 49.841,74.984 C10.1
VERTICAL: DD3.6 DD6.2 | length 15.8
  Top Layer w0.254: DD6.2 127.432,88.468 129.032,86.868 129.032,82.042 132.667,78.407 DD3.6
WORK_EN: DD1.60 DD2.12 DD2.13 | length 15.2
  Top Layer w0.254: DD2.12 DD2.13 67.79,80.998 68.992,82.2 DD1.60
XTL1: C2.2 DD1.24 Y1.2 | length 16.6
  Top Layer w0.254: DD1.24 105.6,84.6 Y1.2 107.9,86.9 C2.2
XTL2: C7.2 DD1.23 Y1.1 | length 20.8
  Top Layer w0.254: DD1.23 99.708,83.8 99.989,84.081 104.669,84.081 107.25,81.5 Y1.1 107.9,77.1 C7.2
pads on no net: C1.0 C2.0 C3.0 C4.0 C5.0 C6.0 C7.0 C8.0 C9.0 C10.0 C12.0 C13.0 C14.0 C15.0 C16.0 C17.0 C18.0 C19.0 C20.0 C21.0 C22.0 C23.0 C24.0 C25.0 DA1.0 DD1.1 DD1.51 DD1.54 DD1.55 DD1.56 DD1.57 DD2.0 DD3.4 DD3.5 DD4.1 DD6.1 LD1.0 LD2.0 P1.0 P2.0 P2.7 P2.8 P2.9 P2.10 P5.0 P5.3 R1.0 R2.0 R3.0 R4.0 R5.0 R6.0 R7.0 R8.0 R9.0 R10.0 R11.0 R12.0 R13.0 R14.0 R15.0 R17.0 R18.0 R20.0 R21.0 R22.0 R23.0 R24.0 R25.0 R26.0 R27.0 R28.0 R29.0 R30.0 R31.0 R32.0 R33.0 R34.0 R35.0 R36.0 R37.0 R38.0 R39.0 R40.0 VD1.0 VD2.0 VD3.0 VT2.0 Y1.0

## Polygon pours and split planes (outlines as drawn)
GND on Bottom Layer "Top Layer-No Net 1" (solid, remove dead copper, pour order 4): 30.146,113.168 30.146,50.168 165.146,50.168 165.146,113.168
GND on Top Layer "Top Layer-No Net 1" (solid, remove dead copper, pour order 3): 30.015,113.043 30.015,50.043 165.015,50.043 165.015,113.043

## Keep-outs
Keep-Out Layer:
  the board outline again, w2

## Text inside footprints (layer, text, board x,y; h text height)
C9: Top Overlay "+" at 112.776,92.71 h0.7 r90
C9: Top Overlay "+" at 45.508,81.444 h0.7 r90
C10: Top Overlay "+" at 45.508,72.444 h0.7 r90
P1: Top Overlay "2" at 82.634,111.318 h0.7 r180; Top Overlay "1" at 82.289,103.063 h0.7; Top Overlay "14" at 98.135,111.318 h0.7 r180; Top Overlay "13" at 97.087,103.063 h0.7
P2: Top Overlay "15" at 63.125,103.063 h0.7; Top Overlay "16" at 64.173,111.318 h0.7 r180; Top Overlay "1" at 45.787,103.063 h0.7; Top Overlay "2" at 46.132,111.318 h0.7 r180
P5: Top Overlay "2" at 53.576,51.932 h0.7; Top Overlay "1" at 53.921,60.187 h0.7 r180; Top Overlay "10" at 43.155,51.932 h0.7; Top Overlay "9" at 44.203,60.187 h0.7 r180